# Altium PCB PCB1_1.pcbdoc (part 2 of 2)
Units mil, origin at the board's own origin, x right, y up, seen from the top; angles counter-clockwise.
Board outline 4397.5 x 3275 mil, 2 copper layers (Top Layer, Bottom Layer); 53 components, 83 nets, 273 pads, 69 vias.
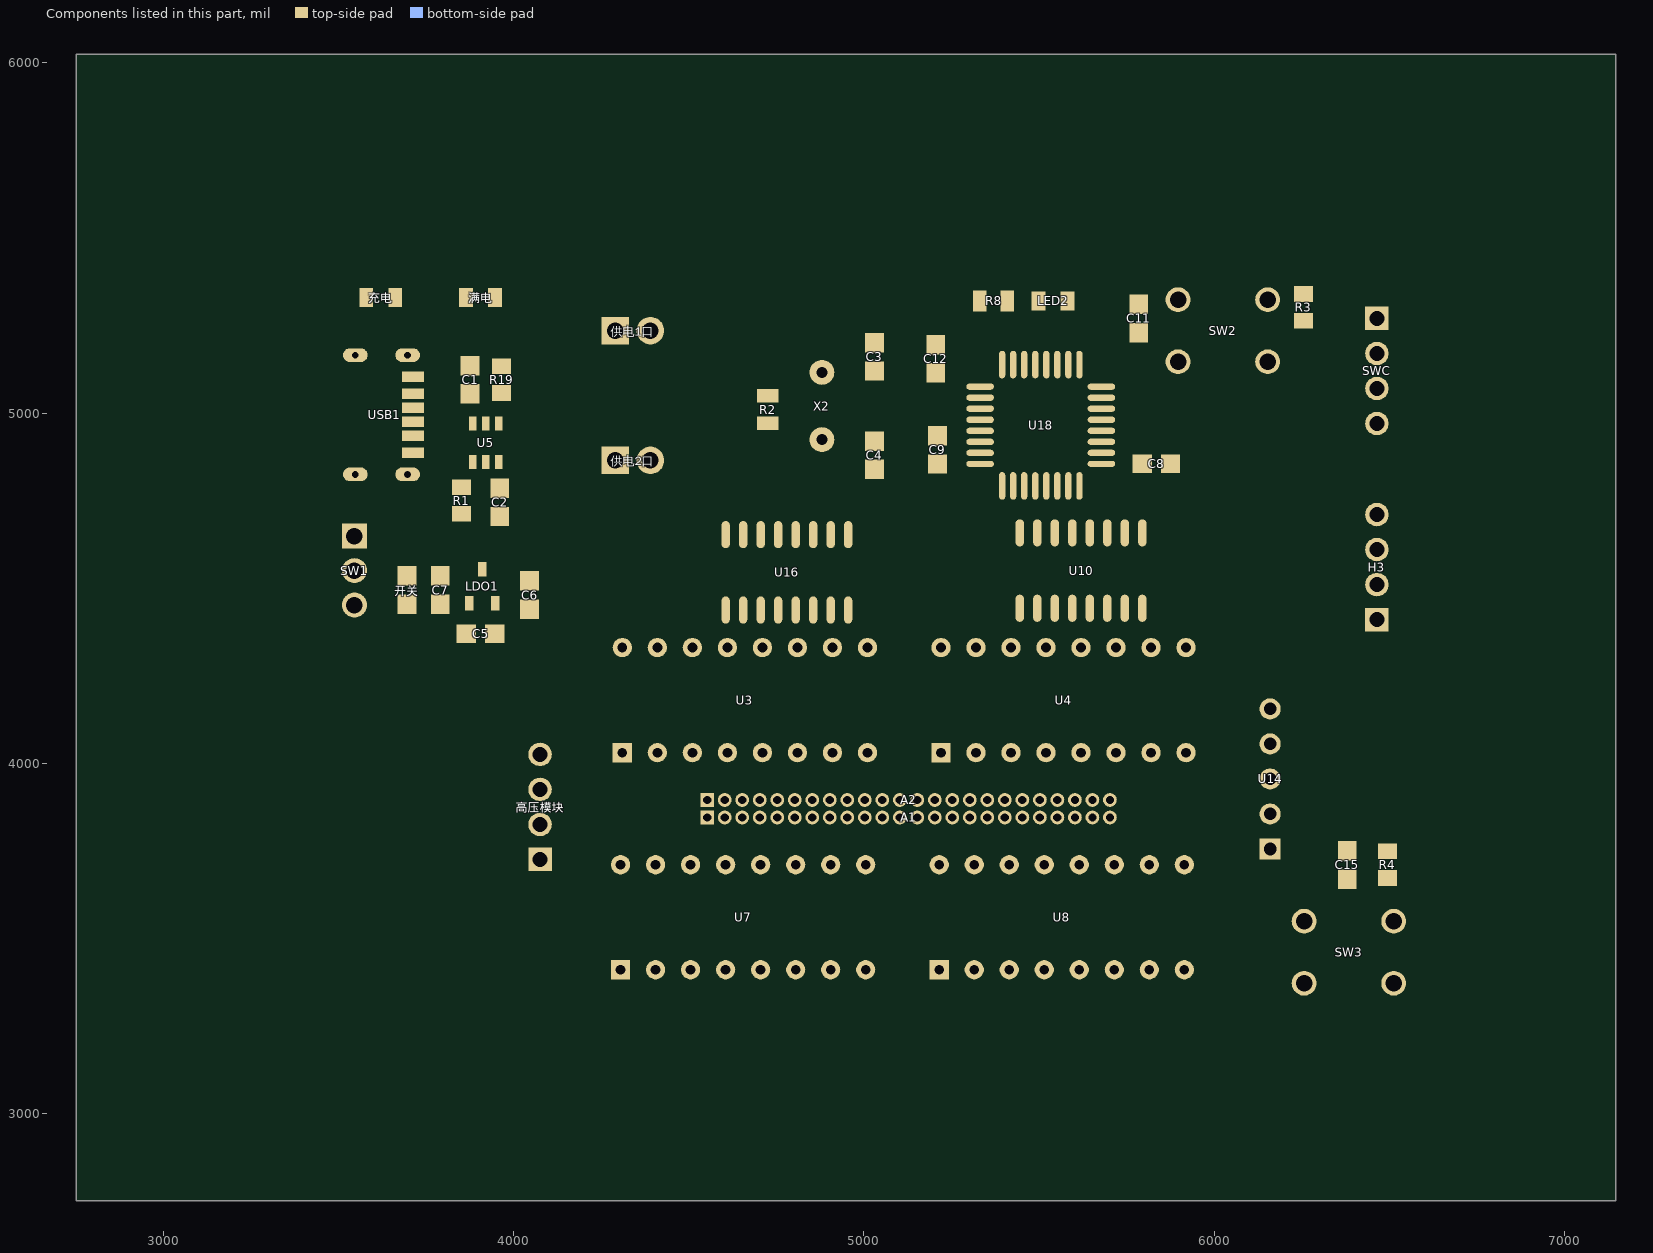
[diagram p2: the components of this part, seen from the top]

## Other copper
Top Layer:
  region net $1N3546: 5463.97,5315 5478.97,5302.5 5478.97,5337.5 5463.97,5325
  region net PB3/LED: 5578.74,5277.45 5588.74,5277.45 5601.03,5292.45 5566.24,5292.45
  region net VCC: 5295.94,5315 5310.94,5302.5 5310.94,5337.5 5295.94,5325
  region net $1N3546: 5444.06,5315 5444.06,5325 5429.06,5337.5 5429.06,5302.5
  region net PF0: 4769.37,5059.37 4755.51,5069.06 4755.51,5029.69 4769.37,5039.37
  region net PF1: 4774.37,4980.63 4755.51,4990.31 4755.51,4950.94 4774.37,4960.63
  region net RST: 5777.5,5179.19 5792.5,5179.19 5811.25,5201.69 5758.75,5201.69
  region net RST: 5826.57,5234.45 5811.57,5246.95 5811.57,5211.95 5826.57,5224.45
  region net $1N5248: 3885,4894.57 3875,4894.57 3871.78,4879.57 3893.43,4879.57
  region net $1N5239: 3887.6,4947.6 3893.43,4950.44 3871.78,4950.44 3877.6,4947.6
  region net $1N5242: 3925,4935.44 3930.83,4950.44 3909.18,4950.44 3915,4935.44
  region net $1N5243: 3960,5170.3 3947.5,5155.3 3982.5,5155.3 3970,5170.3
  region net $1N5239: 3850,4825.3 3840,4825.3 3827.5,4810.3 3862.5,4810.3
  region net $1N5243: 3940,5290 3950,5290 3962.5,5302.45 3927.5,5302.45
  region net $1N5243: 3981.03,5325 3981.03,5335 3966.03,5347.5 3966.03,5312.5
  region net $1N5242: 3828.97,5335 3828.97,5325 3843.97,5312.5 3843.97,5347.5
  region net $1N5243: 3666.35,5287.45 3678.85,5302.45 3643.85,5302.45 3656.35,5287.45
  region net $1N5248: 3583.65,5287.45 3596.15,5302.45 3561.15,5302.45 3573.65,5287.45
  region net PA14/SWC: 6409.04,5277.5 6409.04,5262.5 6431.54,5243.75 6431.54,5296.25
  region net PA13/SWD: 6442.87,5195.1 6408.11,5177.5 6408.11,5162.5 6442.87,5144.9
  region net VCC: 6487.13,4944.9 6521.89,4962.5 6521.89,4977.5 6487.13,4995.1
  region net 4B: 4602,4480 4594.5,4469.74 4615.5,4469.74 4608,4480
  region net 4D: 4650,4384.61 4660,4384.61 4666.85,4410.35 4643.15,4410.35
  region net 4A: 4700,4384.61 4710,4384.61 4716.85,4410.35 4693.15,4410.35
  region net 3C: 4750,4384.61 4760,4384.61 4766.85,4410.35 4743.15,4410.35
  region net 3B: 4802,4389.89 4808,4389.89 4815.5,4404.86 4794.5,4404.86
  region net 3D: 4860,4489.99 4850,4489.99 4843.15,4464.25 4866.85,4464.25
  region net 3A: 4900,4489.99 4893.15,4464.25 4916.85,4464.25 4910,4489.99
  region net 4C: 4658,4605.29 4665.5,4620.26 4644.5,4620.26 4652,4605.29
  region net APA3/SER2: 4708,4700.11 4702,4700.11 4694.5,4685.14 4715.5,4685.14
  region net APA6/STCP: 4808,4700.11 4802,4700.11 4794.5,4685.14 4815.5,4685.14
  region net APA4/SHCP: 4858,4605.29 4865.5,4620.26 4844.5,4620.26 4852,4605.29
  region net 2B: 5450,4389.61 5456.85,4415.35 5433.15,4415.35 5440,4389.61
  region net 2D: 5490,4494.99 5483.15,4469.25 5506.85,4469.25 5500,4494.99
  region net 2A: 5550,4389.61 5556.85,4415.35 5533.15,4415.35 5540,4389.61
  region net 1C: 5598,4394.89 5605.5,4409.86 5584.5,4409.86 5592,4394.89
  region net 1B: 5640,4390 5650,4390 5656.85,4415.35 5633.15,4415.35
  region net 1D: 5700,4494.99 5690,4494.99 5683.15,4469.25 5706.85,4469.25
  region net 1A: 5748,4489.71 5742,4489.71 5734.5,4474.74 5755.5,4474.74
  region net 2C: 5500,4605.01 5506.85,4630.75 5483.15,4630.75 5490,4605.01
  region net APA7/SER1: 5540,4700 5533.15,4684.65 5556.85,4684.65 5550,4700
  region net APA6/STCP: 5640,4710.39 5633.15,4684.65 5656.85,4684.65 5650,4710.39
  region net APA4/SHCP: 5690,4710.39 5683.15,4684.65 5706.85,4684.65 5700,4710.39
  region net 4_1: 5223,3993.5 5230.5,4002.5 5209.5,4002.5 5217,3993.5
  region net 4_2: 5299.38,4011.81 5317,3983.25 5323,3983.25 5340.62,4011.81
  region net 4A: 5440.62,4048.19 5423,4076.75 5417,4076.75 5399.38,4048.19
  region net 4D: 5540.62,4048.19 5523,4076.75 5517,4076.75 5499.38,4048.19
  region net 4B: 5699.38,4011.81 5717,3990 5723,3990 5740.62,4011.81
  region net 4C: 5799.38,4011.81 5817,3983.25 5823,3983.25 5840.62,4011.81
  region net 4_6: 5938.19,4009.38 5966.75,4027 5966.75,4033 5938.19,4050.62
  region net 4_7: 5899.38,4311.81 5917,4283.25 5923,4283.25 5940.62,4311.81
  region net 4_8: 5799.38,4311.81 5817,4283.25 5823,4283.25 5840.62,4311.81
  region net 4_9: 5699.38,4311.81 5717,4283.25 5723,4283.25 5740.62,4311.81
  region net 4_0: 5499.38,4311.81 5517,4283.25 5523,4283.25 5540.62,4311.81
  region net 4_5: 5399.38,4311.81 5417,4283.25 5423,4283.25 5440.62,4311.81
  region net 4_4: 5299.38,4311.81 5317,4283.25 5323,4283.25 5340.62,4311.81
  region net 4_3: 5199.38,4311.81 5217,4283.25 5223,4283.25 5240.62,4311.81
  region net 3_1: 4343.86,4000.38 4337.5,4017.35 4322.65,4002.5 4339.62,3996.14
  region net 3_2: 4394.41,4007.35 4429.16,3986.6 4435.94,3988.3 4434.42,4017.36
  region net 3_6: 4989.38,4011.81 5007,3990 5013,3990 5030.62,4011.81
  region net 3_7: 4989.38,4311.81 5007,4283.25 5013,4283.25 5030.62,4311.81
  region net 3_8: 4889.38,4311.81 4907,4283.25 4913,4283.25 4930.62,4311.81
  region net 3_9: 4789.38,4311.81 4807,4283.25 4813,4283.25 4830.62,4311.81
  region net 3_0: 4589.38,4311.81 4607,4290 4613,4290 4630.62,4311.81
  region net 3_5: 4489.38,4311.81 4507,4285 4513,4285 4530.62,4311.81
  region net 3_4: 4389.38,4311.81 4407,4283.25 4413,4283.25 4430.62,4311.81
  region net 3_3: 4289.38,4311.81 4307,4283.25 4313,4283.25 4330.62,4311.81
  region net 2C: 5794.38,3391.81 5812,3363.25 5818,3363.25 5835.62,3391.81
  region net 2_7: 5935.62,3728.19 5918,3756.75 5912,3756.75 5894.38,3728.19
  region net 2_8: 5835.62,3728.19 5818,3756.75 5812,3756.75 5794.38,3728.19
  region net 2_9: 5735.62,3728.19 5718,3750 5712,3750 5694.38,3728.19
  region net 2_0: 5535.62,3728.19 5518,3756.75 5512,3756.75 5494.38,3728.19
  region net 2_5: 5435.62,3728.19 5418,3756.75 5412,3756.75 5394.38,3728.19
  region net 2_4: 5335.62,3728.19 5318,3750 5312,3750 5294.38,3728.19
  region net 2_3: 5235.62,3728.19 5218,3745 5212,3745 5194.38,3728.19
  region net 1A: 4525.62,3428.19 4508,3456.75 4502,3456.75 4484.38,3428.19
  region net 1D: 4625.62,3428.19 4608,3456.75 4602,3456.75 4584.38,3428.19
  region net 1B: 4825.62,3428.19 4808,3456.75 4802,3456.75 4784.38,3428.19
  region net 1C: 4925.62,3428.19 4908,3445 4902,3445 4884.38,3428.19
  region net 1_7: 5025.62,3728.19 5008,3756.75 5002,3756.75 4984.38,3728.19
  region net 1_8: 4925.62,3728.19 4908,3745 4902,3745 4884.38,3728.19
  region net 1_9: 4825.62,3728.19 4808,3740 4802,3740 4784.38,3728.19
  region net 1_0: 4625.62,3728.19 4608,3750 4602,3750 4584.38,3728.19
  region net 1_5: 4525.62,3728.19 4508,3755 4502,3755 4484.38,3728.19
  region net 1_4: 4425.62,3728.19 4408,3756.75 4402,3756.75 4384.38,3728.19
  region net 1_3: 4325.62,3728.19 4308,3756.75 4302,3756.75 4284.38,3728.19
  region net 4_6: 5715.45,3880.24 5735.89,3892 5735.89,3898 5715.45,3909.76
  region net 4_7: 5667.19,3908.02 5655.43,3927.43 5649.43,3927.43 5637.66,3908.02
  region net 4_8: 5617.19,3908.02 5605.43,3928.46 5599.43,3928.46 5587.66,3908.02
  region net 4_9: 5565.47,3909.74 5553,3928.79 5547,3928.05 5536.17,3906.1
  region net 4_0: 5518.77,3905.98 5508,3928.02 5502,3928.81 5489.49,3909.84
  region net 4_5: 5467.19,3908.02 5455.43,3928.46 5449.43,3928.46 5437.66,3908.02
  region net 4_4: 5417.19,3908.02 5405.43,3928.46 5399.43,3928.46 5387.66,3908.02
  region net 4_3: 5365.47,3909.74 5353,3928.79 5347,3928.05 5336.17,3906.1
  region net 4_2: 5315.47,3909.74 5303,3928.79 5297,3928.05 5286.17,3906.1
  region net 4_1: 5267.19,3908.02 5255.43,3928.46 5249.43,3928.46 5237.66,3908.02
  region net 3_6: 5117.19,3908.02 5105.43,3928.46 5099.43,3928.46 5087.66,3908.02
  region net 3_7: 5067.19,3908.02 5055.43,3928.46 5049.43,3928.46 5037.66,3908.02
  region net 3_8: 5017.19,3908.02 5005.43,3928.46 4999.43,3928.46 4987.66,3908.02
  region net 3_9: 4967.19,3908.02 4955.43,3928.46 4949.43,3928.46 4937.66,3908.02
  region net 3_0: 4917.19,3908.02 4905.43,3928.46 4899.43,3928.46 4887.66,3908.02
  region net 3_5: 4867.19,3908.02 4855.43,3928.46 4849.43,3928.46 4837.66,3908.02
  region net 3_4: 4815.47,3909.74 4803,3928.79 4797,3928.05 4786.17,3906.1
  region net 3_3: 4767.19,3908.02 4755.43,3928.46 4749.43,3928.46 4737.66,3908.02
  region net 3_2: 4703.66,3914.65 4680.89,3920.78 4676.64,3916.54 4682.78,3893.77
  region net 3_1: 4653.66,3914.65 4630.89,3920.78 4626.64,3916.54 4632.78,3893.77
  region net 2_6: 5715.45,3830.24 5735.89,3842 5735.89,3848 5715.45,3859.76
  region net 2_7: 5637.66,3831.98 5649.43,3812.57 5655.43,3812.57 5667.19,3831.98
  region net 2_8: 5587.66,3831.98 5599.43,3811.54 5605.43,3811.54 5617.19,3831.98
  region net 2_9: 5536.17,3833.9 5547,3811.95 5553,3811.21 5565.47,3830.26
  region net 2_0: 5486.17,3833.9 5497,3811.95 5503,3811.21 5515.47,3830.26
  region net 2_5: 5437.66,3831.98 5449.43,3811.54 5455.43,3811.54 5467.19,3831.98
  region net 2_4: 5386.17,3833.9 5397,3811.95 5403,3811.21 5415.47,3830.26
  region net 2_3: 5337.66,3831.98 5349.43,3812.43 5355.43,3812.43 5367.19,3831.98
  region net 1_7: 5037.66,3831.98 5049.43,3811.54 5055.43,3811.54 5067.19,3831.98
  region net 1_8: 4987.66,3831.98 4999.43,3811.54 5005.43,3811.54 5017.19,3831.98
  region net 1_9: 4939.49,3830.16 4952,3820 4958,3820 4968.77,3834.02
  region net 1_0: 4886.17,3833.9 4897,3811.95 4903,3811.21 4915.47,3830.26
  region net 1_5: 4837.66,3831.98 4849.43,3811.54 4855.43,3811.54 4867.19,3831.98
  region net 1_4: 4787.66,3831.98 4799.43,3817.43 4805.43,3817.43 4817.19,3831.98
  region net 1_3: 4737.66,3831.98 4749.43,3817.43 4755.43,3817.43 4767.19,3831.98
  region net PA9/TX: 6439.36,4631.51 6407.09,4612.5 6409.35,4597.5 6446.86,4581.88
  region net PA10/RX: 6446.86,4738.12 6409.35,4722.5 6407.09,4707.5 6439.36,4688.49
  region net VCC: 5279.76,5067.74 5301.26,5066.38 5301.26,5084.1 5279.76,5082.74
  region net PF0: 5278.95,5048.74 5278.95,5038.74 5301.26,5034.88 5301.26,5052.6
  region net PF1: 5278.79,5017 5279.12,5007 5301.26,5003.38 5301.26,5021.1
  region net RST: 5389.5,4988.25 5362.28,4989.61 5362.28,4971.89 5389.5,4973.25
  region net VCC: 5274.04,4941.75 5301.26,4940.39 5301.26,4958.11 5274.04,4956.75
  region net VCC: 5735.96,4862.26 5708.74,4863.62 5708.74,4845.9 5735.96,4847.26
  region net PA9/TX: 5735.96,4925.26 5708.74,4926.62 5708.74,4908.9 5735.96,4910.26
  region net PA10/RX: 5735.96,4956.75 5708.74,4958.11 5708.74,4940.39 5735.96,4941.75
  region net PA11/SCL: 5735.96,4988.25 5708.74,4989.61 5708.74,4971.89 5735.96,4973.25
  region net PA12/SDA: 5735.96,5019.74 5708.74,5021.1 5708.74,5003.38 5735.96,5004.74
  region net PA13/SWD: 5735.96,5051.24 5708.74,5052.6 5708.74,5034.88 5735.96,5036.24
  region net PA14/SWC: 5735.96,5082.74 5708.74,5084.1 5708.74,5066.38 5735.96,5067.74
  region net PB4: 5555,5192.16 5545,5188.85 5543.38,5168.74 5561.1,5168.74
  region net PB3/LED: 5578.74,5191.05 5574.88,5168.74 5592.6,5168.74 5588.74,5191.05
  region net APA7/SER1: 5515.75,4738.95 5525.75,4738.95 5529.61,4761.26 5511.89,4761.26
  region net APA4/SHCP: 5495,4844.02 5485,4845.05 5480.39,4822.28 5498.11,4822.28
  region net APA6/STCP: 5430,4845.31 5420,4843.55 5417.4,4822.28 5435.12,4822.28
  region net APA6/STCP: 5429.26,4743.92 5435.12,4761.26 5417.4,4761.26 5423.26,4743.92
  region net APA3/SER2: 5397.76,4744.76 5403.62,4761.26 5385.9,4761.26 5391.76,4744.76
  region net PF1: 4856.56,4950.51 4821.06,4933.94 4821.06,4913.94 4856.56,4897.37
  region net PF1: 4903.44,4897.37 4940.24,4913.94 4940.24,4933.94 4903.44,4950.51
  region net PF0: 4856.56,5142.63 4836.06,5126.06 4836.06,5106.06 4856.56,5089.49
  region net PF0: 4903.44,5089.49 4940.24,5106.06 4940.24,5126.06 4903.44,5142.63
  region net PF0: 5035,5077.25 5047.5,5092.25 5012.5,5092.25 5025,5077.25
  region net PF0: 4973.4,5126.06 4973.4,5106.06 5003.4,5092.25 5003.4,5147.75
  region net PF1: 4973.4,4913.94 5003.4,4892.25 5003.4,4947.75 4973.4,4933.94
  region net PF1: 5025,4962.75 5012.5,4947.75 5047.5,4947.75 5035,4962.75
  region net VCC: 6304.6,5352.5 6282.1,5362.3 6282.1,5318.75 6304.6,5337.5
  region net RST: 6260,5226.7 6272.5,5241.7 6237.5,5241.7 6250,5226.7
  region net VCC: 5802.5,4805.9 5821.25,4828.4 5768.75,4828.4 5787.5,4805.9
  region net VCC: 5744.25,4862.26 5744.25,4847.26 5766.75,4828.51 5766.75,4881.01
  region net VCC: 5160.9,4928 5183.4,4909.25 5183.4,4961.75 5160.9,4943
  region net VCC: 5259.1,4941.75 5259.1,4956.75 5236.6,4963.25 5236.6,4923
  region net VCC: 5240.5,5107 5240.5,5122 5231.6,5140.75 5231.6,5088.25
  region net VCC: 5155.9,5107.5 5178.4,5088.75 5178.4,5141.25 5155.9,5122.5
  region net PB4: 6539.52,3572.02 6517.95,3602.05 6507.95,3602.05 6486.38,3572.02
  region net PB4: 6283.62,3572.02 6262.05,3602.05 6252.05,3602.05 6230.48,3572.02
  region net RST: 5923.62,5169.86 5902.05,5202.95 5892.05,5202.95 5870.48,5169.86
  region net RST: 5920.49,5119.85 5957.29,5141.42 5957.29,5151.42 5920.49,5172.99
  region net RST: 6129.51,5172.99 6092.71,5151.42 6092.71,5141.42 6129.51,5119.85
  region net RST: 6171.18,5116.04 6212.1,5135 6213.94,5145 6180.81,5168.31
  region net PB4: 6452.9,3667 6467.9,3654.5 6467.9,3689.5 6452.9,3677
  region net PB4: 6490,3634.7 6500,3634.7 6512.5,3649.7 6477.5,3649.7
  region net PB4: 6537.1,3677 6522.1,3689.5 6522.1,3654.5 6537.1,3667
  region net VCC: 6490,3785.3 6477.5,3770.3 6512.5,3770.3 6500,3785.3
  region net PB4: 6338.4,3663.9 6353.4,3651.4 6353.4,3686.4 6338.4,3673.9
  region net PB4: 6421.6,3667 6421.6,3677 6406.6,3689.5 6406.6,3654.5
  region net $1N5248: 3758.49,4767.38 3748.27,4765 3748.27,4755 3758.49,4752.62
  region net $1N5242: 4067.62,5188.49 4070,5178.27 4080,5178.27 4082.38,5188.49
  region net $1N5242: 3771.51,5322.62 3781.73,5325 3781.73,5335 3771.51,5337.38
  region net $1N5248: 3872.62,4903.49 3875,4893.27 3885,4893.27 3887.38,4903.49
  region net PB4: 5542.62,5228.49 5545,5218.27 5555,5218.27 5557.38,5228.49
  region net APA4/SHCP: 5482.46,4928.13 5485,4918.02 5495,4918.52 5497.2,4928.87
  region net APA6/STCP: 5417.62,4893.49 5420,4883.27 5430,4883.27 5432.38,4893.49
  region net PB4: 6312.62,4998.49 6315,4988.27 6325,4988.27 6327.38,4998.49
  region net APA6/STCP: 5675.61,4767.05 5670.89,4757.96 5680.68,4753.61 5689.1,4761.05
  region net APA4/SHCP: 5687.62,4718.49 5690,4708.27 5700,4708.27 5702.38,4718.49
  region net 2C: 5919.9,4587.62 5930.12,4592 5930.12,4598 5919.9,4602.38
  region net 1D: 5959.38,4505.18 5969.71,4501.05 5973.95,4505.29 5969.82,4515.62
  region net 1A: 5926.51,4487.62 5936.73,4492 5936.73,4498 5926.51,4502.38
  region net 1B: 6022.62,4393.49 6027,4383.27 6033,4383.27 6037.38,4393.49
  region net 1C: 6047.62,4363.49 6052,4353.27 6058,4353.27 6062.38,4363.49
  region net VCC: 6487.62,3803.49 6490,3793.27 6500,3793.27 6502.38,3803.49
  region net 2C: 5502.38,4601.51 5500,4611.73 5490,4611.73 5487.62,4601.51
  region net 2D: 5487.62,4493.49 5490,4483.27 5500,4483.27 5502.38,4493.49
  region net 1D: 5687.62,4508.49 5690,4498.27 5700,4498.27 5702.38,4508.49
  region net 1A: 5737.62,4488.49 5742,4478.27 5748,4478.27 5752.38,4488.49
  region net 1B: 5652.38,4396.51 5650,4406.73 5640,4406.73 5637.62,4396.51
  region net 1C: 5663.49,4377.38 5653.27,4373 5653.27,4367 5663.49,4362.62
  region net 2A: 5552.38,4386.51 5550,4396.73 5540,4396.73 5537.62,4386.51
  region net 2B: 5452.38,4386.51 5450,4396.73 5440,4396.73 5437.62,4386.51
  region net 4A: 5346.51,4412.62 5356.73,4417 5356.73,4423 5346.51,4427.38
  region net 4C: 4662.38,4591.51 4658,4601.73 4652,4601.73 4647.62,4591.51
  region net APA4/SHCP: 4862.38,4601.51 4858,4611.73 4852,4611.73 4847.62,4601.51
  region net 3D: 4847.62,4493.49 4850,4483.27 4860,4483.27 4862.38,4493.49
  region net 3A: 4897.62,4493.49 4900,4483.27 4910,4483.27 4912.38,4493.49
  region net 4B: 4551.51,4492.62 4561.73,4497 4561.73,4503 4551.51,4507.38
  region net 4D: 4662.38,4386.51 4660,4396.73 4650,4396.73 4647.62,4386.51
  region net 4A: 4712.38,4386.51 4710,4396.73 4700,4396.73 4697.62,4386.51
  region net 3C: 4762.38,4386.51 4760,4396.73 4750,4396.73 4747.62,4386.51
  region net 3B: 4812.38,4386.51 4808,4396.73 4802,4396.73 4797.62,4386.51
  region net 4B: 5783.49,3982.38 5773.27,3978 5773.27,3972 5783.49,3967.62
  region net 4C: 5827.38,3961.51 5823,3971.73 5817,3971.73 5812.62,3961.51
  region net 4D: 5512.62,4193.49 5517,4183.27 5523,4183.27 5527.38,4193.49
  region net 2_6: 5868.49,3852.38 5858.27,3848 5858.27,3842 5868.49,3837.62
Bottom Layer:
  region net PA12/SDA: 6161.88,3884.94 6129.24,3896.37 6118.63,3885.76 6130.06,3853.12
  region net PA11/SCL: 6189.51,3949.61 6203.19,3982.59 6193.84,3994.45 6161.66,3984.95
  region net 3A: 4530.62,4048.19 4513,4076.75 4507,4076.75 4489.38,4048.19
  region net 3D: 4630.62,4048.19 4613,4075 4607,4075 4589.38,4048.19
  region net 3B: 4830.62,4048.19 4813,4076.75 4807,4076.75 4789.38,4048.19
  region net 3C: 4930.62,4048.19 4913,4076.75 4907,4076.75 4889.38,4048.19
  region net 2_1: 5212,3446.5 5204.5,3437.5 5225.5,3437.5 5218,3446.5
  region net 2_2: 5335.62,3428.19 5318,3456.75 5312,3456.75 5294.38,3428.19
  region net 2A: 5435.62,3428.19 5418,3456.75 5412,3456.75 5394.38,3428.19
  region net 2D: 5535.62,3428.19 5518,3456.75 5512,3456.75 5494.38,3428.19
  region net 2B: 5735.62,3428.19 5718,3456.75 5712,3456.75 5694.38,3428.19
  region net 2_6: 5935.62,3428.19 5918,3456.75 5912,3456.75 5894.38,3428.19
  region net 1_1: 4334.62,3443.86 4317.65,3437.5 4332.5,3422.65 4338.86,3439.62
  region net 1_2: 4432.45,3408.28 4440.18,3440.94 4435.94,3445.18 4403.28,3437.45
  region net 1_6: 5032.45,3408.28 5040.18,3440.94 5035.94,3445.18 5003.28,3437.45
  region net 2_2: 5287.66,3831.98 5299.43,3811.54 5305.43,3811.54 5317.19,3831.98
  region net 2_1: 5237.66,3831.98 5249.43,3812.43 5255.43,3812.43 5267.19,3831.98
  region net 1_6: 5087.66,3831.98 5099.43,3811.54 5105.43,3811.54 5117.19,3831.98
  region net 1_2: 4687.66,3831.98 4699.43,3811.54 4705.43,3811.54 4717.19,3831.98
  region net 1_1: 4637.66,3831.98 4649.43,3811.54 4655.43,3811.54 4667.19,3831.98
  region net $1N5248: 3774.82,4759.38 3780.37,4768.3 3773.3,4775.37 3764.38,4769.82
  region net $1N5242: 4082.38,5201.51 4080,5211.73 4070,5211.73 4067.62,5201.51
  region net $1N5242: 3757.62,5323.49 3760,5313.27 3770,5313.27 3772.38,5323.49
  region net $1N5248: 3873.49,4917.38 3863.27,4915 3863.27,4905 3873.49,4902.62
  region net PB4: 5556.51,5227.62 5566.73,5230 5566.73,5240 5556.51,5242.38
  region net APA4/SHCP: 5482.99,4942.38 5472.77,4940 5472.77,4930 5482.99,4927.62
  region net APA4/SHCP: 5496.01,4927.62 5506.24,4930 5506.24,4940 5496.01,4942.38
  region net APA6/STCP: 5431.51,4892.62 5441.73,4895 5441.73,4905 5431.51,4907.38
  region net PB4: 6327.38,5011.51 6325,5021.73 6315,5021.73 6312.62,5011.51
  region net APA6/STCP: 5692.38,4776.51 5690,4786.73 5680,4786.73 5677.62,4776.51
  region net APA4/SHCP: 5704.82,4724.38 5710.37,4733.3 5703.3,4740.37 5694.38,4734.82
  region net 2C: 5906.88,4602.38 5896.66,4598 5896.66,4592 5906.88,4587.62
  region net 1D: 5953.49,4522.38 5943.27,4518 5943.27,4512 5953.49,4507.62
  region net 1A: 5913.49,4502.38 5903.27,4498 5903.27,4492 5913.49,4487.62
  region net 1B: 6023.49,4407.38 6013.27,4403 6013.27,4397 6023.49,4392.62
  region net 1C: 6048.49,4377.38 6038.27,4373 6038.27,4367 6048.49,4362.62
  region net 2C: 5501.51,4587.62 5511.73,4592 5511.73,4598 5501.51,4602.38
  region net 2D: 5501.51,4492.62 5511.73,4497 5511.73,4503 5501.51,4507.38
  region net 1D: 5701.51,4507.62 5711.73,4512 5711.73,4518 5701.51,4522.38
  region net 1A: 5751.51,4487.62 5761.73,4492 5761.73,4498 5751.51,4502.38
  region net 1B: 5654.82,4389.38 5657.12,4397.88 5652.88,4402.12 5644.38,4399.82
  region net 1C: 5676.51,4362.62 5686.73,4367 5686.73,4373 5676.51,4377.38
  region net 2A: 5537.62,4373.49 5542,4365 5548,4365 5552.38,4373.49
  region net 2B: 5438.49,4387.38 5428.27,4383 5428.27,4377 5438.49,4372.62
  region net 4A: 5333.49,4427.38 5323.27,4423 5323.27,4417 5333.49,4412.62
  region net 4C: 4661.51,4577.62 4671.73,4582 4671.73,4588 4661.51,4592.38
  region net APA4/SHCP: 4848.49,4602.38 4838.27,4600 4838.27,4590 4848.49,4587.62
  region net 3D: 4848.49,4507.38 4838.27,4503 4838.27,4497 4848.49,4492.62
  region net 3A: 4905.62,4509.82 4895.29,4513.95 4891.05,4509.71 4895.18,4499.38
  region net 4B: 4552.38,4506.51 4548,4516.73 4542,4516.73 4537.62,4506.51
  region net 4D: 4664.82,4379.38 4668.95,4389.71 4664.71,4393.95 4654.38,4389.82
  region net 4A: 4714.82,4379.38 4718.95,4389.71 4714.71,4393.95 4704.38,4389.82
  region net 3C: 4762.38,4386.51 4758,4395 4752,4395 4747.62,4386.51
  region net 3B: 4798.49,4387.38 4790,4383 4790,4377 4798.49,4372.62
  region net 4B: 5796.51,3967.62 5806.73,3972 5806.73,3978 5796.51,3982.38
  region net 4C: 5826.51,3947.62 5836.73,3952 5836.73,3958 5826.51,3962.38
  region net 4D: 5513.49,4207.38 5503.27,4203 5503.27,4197 5513.49,4192.62
  region net 2_6: 5881.51,3837.62 5891.73,3842 5891.73,3848 5881.51,3852.38

## Silkscreen, mask and mechanical layers (free items; w line width, h text height)
Top Silkscreen Layer:
  text "SWD" at 6537.49,5212.19 h29.2 r270
  text "GND" at 6537.49,5111.59 h29.2 r270
  text "VCC" at 6542.49,5008.54 h29.2 r270
  text "RX" at 6547.49,4750.31 h29.2 r270
  text "TX" at 6544.99,4636.21 h29.2 r270
  text "GND" at 6542.49,4551.59 h29.2 r270
  text "VCC" at 6542.49,4450.39 h29.2 r270
  text "高压危险" at 3575.66,4158.44 h181.25
  text "VIN" at 4149.4,4059.94 h50.98 r270
  text "GND" at 4144.4,3959.94 h50.98 r270
  text "GND" at 4144.4,3859.94 h50.98 r270
  text "HV" at 4144.4,3745.07 h50.98 r270

## Text inside footprints (layer, text, board x,y; h text height)
U14: Top Silkscreen Layer "DS3231" at 6120.19,4264.64 h76.56; Top Silkscreen Layer "VCC" at 6361.16,3772.56 h43.33 r180; Top Silkscreen Layer "SDA" at 6361.16,3872.56 h43.33 r180; Top Silkscreen Layer "SLC" at 6361.16,3972.56 h43.33 r180; Top Silkscreen Layer "NC" at 6360.64,4072.56 h43.33 r180; Top Silkscreen Layer "GND" at 6361.16,4172.56 h43.33 r180